# Altium PCB 12ax7 Test Board.PcbDoc
Units mil, origin at the board's own origin, x right, y up, seen from the top; angles counter-clockwise.
Board outline 6000 x 4000 mil, 2 copper layers (Top Layer, Bottom Layer); 4 components, 9 nets, 18 pads, 0 vias.
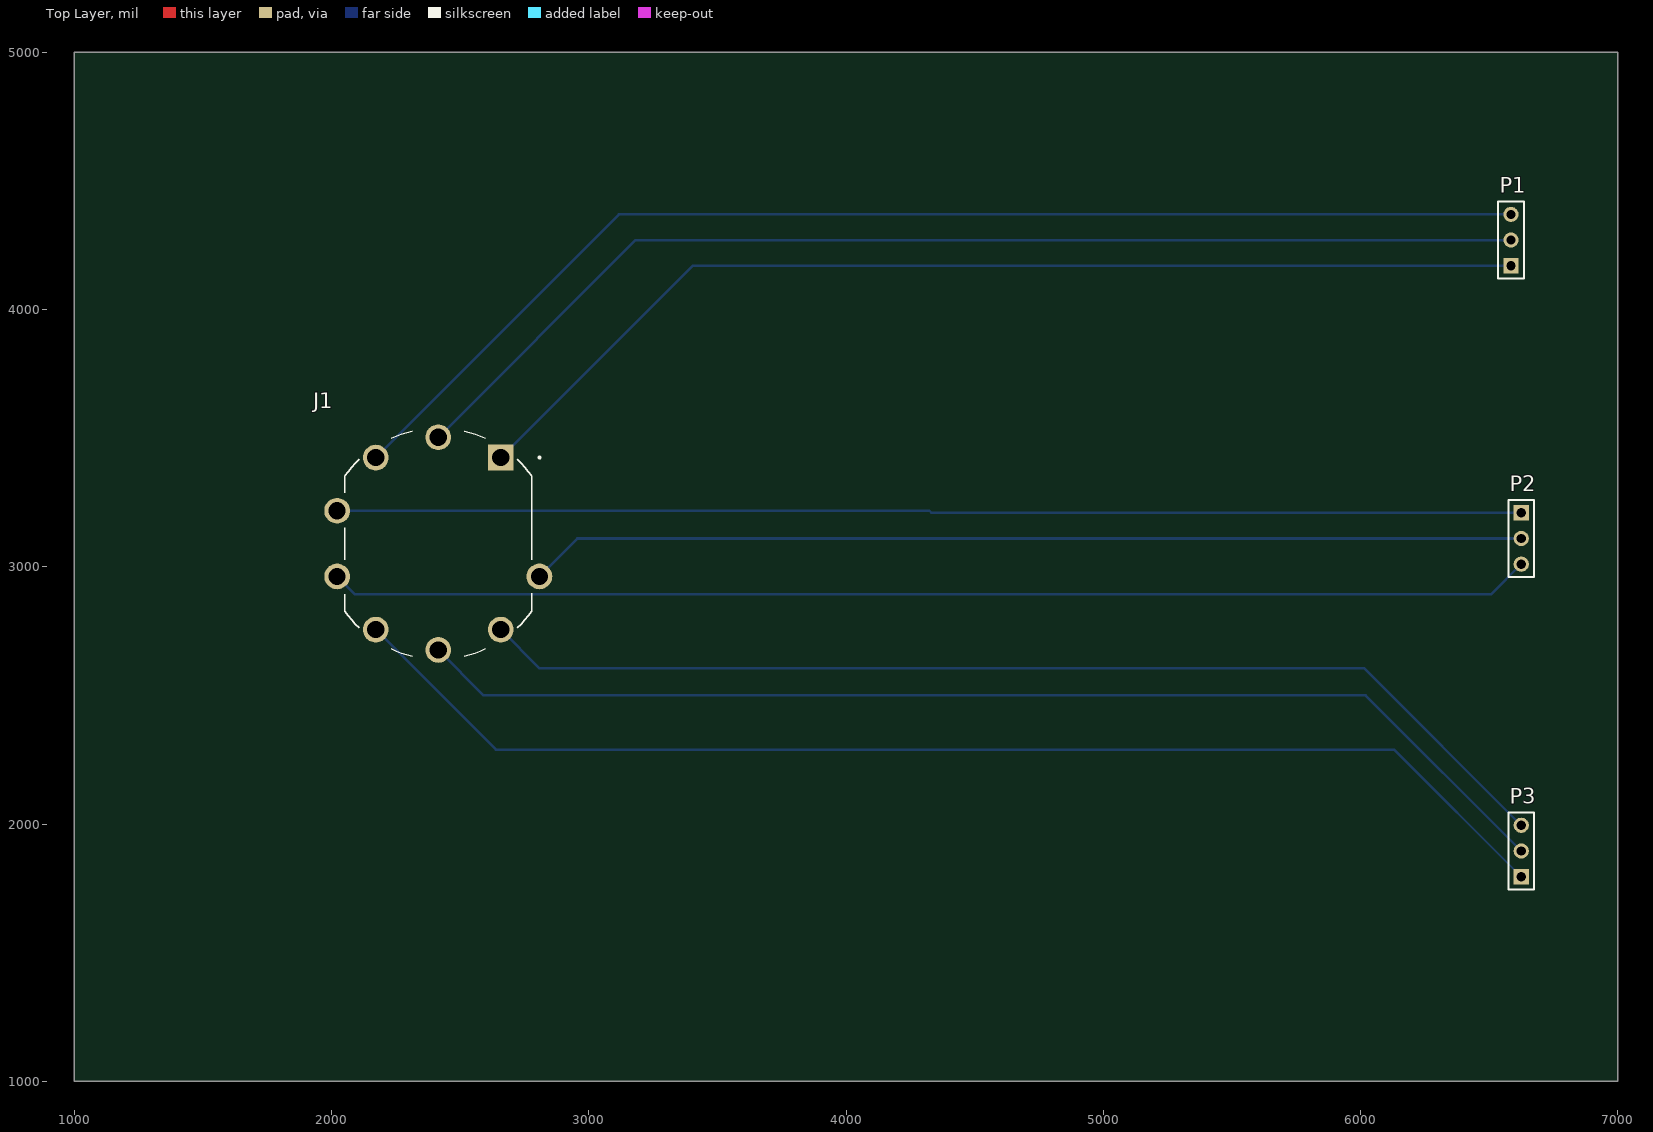
[diagram p0: Top Layer view]
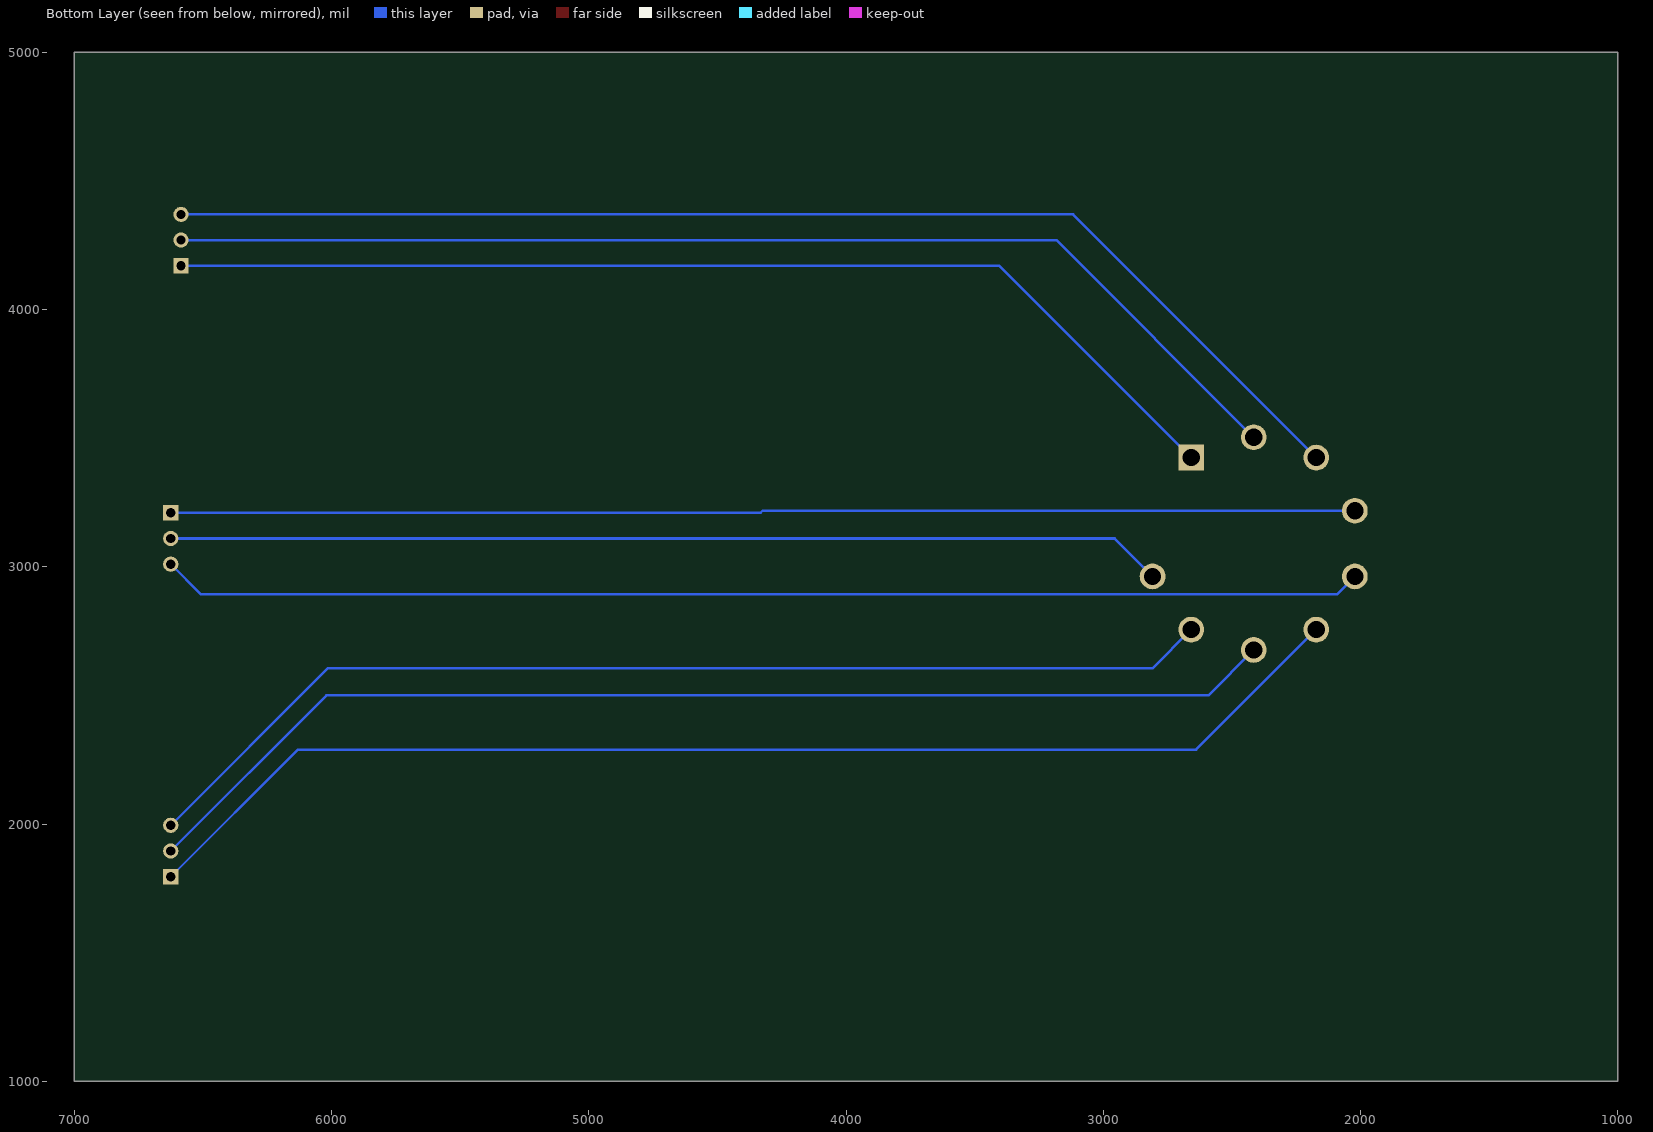
[diagram p1: Bottom Layer view, seen from below]

## Layer stack, top to bottom
Top Solder: solder mask 0.4, Solder Resist, Dk 3.5
Top Layer: signal copper 1.4
Dielectric 1: dielectric 12.6, FR-4, Dk 4.8
Bottom Layer: signal copper 1.4
Bottom Solder: solder mask 0.4, Solder Resist, Dk 3.5

## Board outline
1000,1000 7000,1000 7000,5000 1000,5000

## Design rules (kind name [scope] priority, off if disabled: settings)
Clearance [All] p1: gap=10 ignorepadtopadclearanceinfootprint=FALSE except(0: Arc-Hole Track-Hole SMDPad-Hole THPad-Hole Via-Hole Fill-Hole Poly-Hole Region-Hole Text-Hole)
PolygonConnect [All] p1: connectstyle=Relief reliefconductorwidth=10 reliefentries=4 polygonreliefangle="90 Angle" airgapwidth=10
RoutingVias [All] p1: holewidth=28 width=50 viastyle="Through Hole" minholewidth=28 minwidth=50 maxholewidth=28 maxwidth=50
SolderMaskExpansion [All] p1: expansion=4 istentingtop=FALSE
Width [All] p1: maxlimit=10 minlimit=10 preferedwidth=10
30 further rules are at their usual default settings.

## Components (designator, comment, footprint, x,y, rotation, side; value= is the part's Value field where it differs from the comment)
J1 "VT9-PT" BELTON_VT9-PT 2415,3090 r0 top
P1 "Tube 1" HDR1X3 6585,4170 r90 top
P2 "Heaters" HDR1X3 6625,3210 r270 top
P3 "Tube 2" HDR1X3 6625,1795 r90 top

## Footprints (in the part's own frame and the unit in brackets; to place one, negate y for a bottom-side part, rotate by r counter-clockwise, add the part's x,y. Pads: shape width x height; smd on the part's side, far side on the other; paste and mask are expansions set on the pad)
BELTON_VT9-PT [mm]
  rect 2.54x2.54 hole 1.69: 1(6.172,8.495)
  round 2.54 hole 1.69: 2(0,10.5) 3(-6.172,8.495) 4(-9.986,3.245) 5(-9.986,-3.245) 6(-6.172,-8.495) 7(0,-10.5) 8(6.172,-8.495) 9(9.986,-3.245)
  silkscreen extent -9.25,-11.1 10.1,11.1, body extent -10.55,-11.4 10.55,11.4, height 12
HDR1X3 [mm] "Connector; Header; 3 Position"
  rect 1.5x1.5 hole 0.9: 1(0,0)
  round 1.5 hole 0.9: 2(2.54,0) 3(5.08,0)
  silkscreen extent -1.27,-1.27 6.35,1.27

## Part data
J1: "9 PIN MIN AUTOWAVE SOLDER SOCKET", Package=Package, Availability="In Stock", Check_prices=https://www.snapeda.com/parts/VT9-PT/Belton%20Engineering%20Co.,%20Ltd./view-part/3208909/?ref=eda, MF="Belton Engineering Co., Ltd.", MP=VT9-PT, Price=None, Purchase-URL=https://pricing.snapeda.com/search/part/VT9-PT/?ref=eda, SnapEDA_Link=https://www.snapeda.com/parts/VT9-PT/Belton%20Engineering%20Co.,%20Ltd./view-part/3208909/?ref=snap
P1 P2 P3: library part "Header 3", "Header, 3-Pin", LatestRevisionDate=17-Jul-2002, LatestRevisionNote="Re-released for DXP Platform.", Publisher="Altium Limited"

## Nets (pads, with @x,y where several pads share a name; then routed paths per layer and width w, separated by ;. In a path a pad name is that pad's centre, name@x,y a point inside that pad or via, vN(x,y) a via of type N, cw(c..) or ccw(c..) an arc to the next point about the centre after c; other vN are vias at no path point)
NetJ1_1: J1.1 P1.1 | length 4235.8
  Bottom Layer w10: J1.1 3403.55,4170 P1.1
NetJ1_2: J1.2 P1.2 | length 4487.5
  Bottom Layer w10: J1.2 3181.61,4270 P1.2
NetJ1_3: J1.3 P1.3 | length 4804.6
  Bottom Layer w10: J1.3 3117.59,4370 P1.3
NetJ1_4: J1.4 P2.1 | length 4606.4
  Bottom Layer w10: J1.4 4324,3217.74 4331.74,3210 P2.1
NetJ1_5: J1.5 P2.3 | length 4680.3
  Bottom Layer w10: J1.5 2091.11,2893 6508,2893 P2.3
NetJ1_6: J1.6 P3.1 | length 4850.9
  Bottom Layer w10: J1.6 2638.59,2289 6131,2289 P3.1
NetJ1_7: J1.7 P3.2 | length 4533.8
  Bottom Layer w10: J1.7 2591.61,2500 6020,2500 P3.2
NetJ1_8: J1.8 P3.3 | length 4282.1
  Bottom Layer w10: J1.8 2808.55,2605 6015,2605 P3.3
NetJ1_9: J1.9 P2.2 | length 3878
  Bottom Layer w10: J1.9 2955.89,3110 P2.2